# Altium PCB 03按键.PcbDoc (part 1 of 3)
Units mil, origin at the board's own origin, x right, y up, seen from the top; angles counter-clockwise.
Board outline 1673 x 1444 mil, 2 copper layers (Top Layer, Bottom Layer); 1 components, 7 nets, 11 pads, 20 vias.
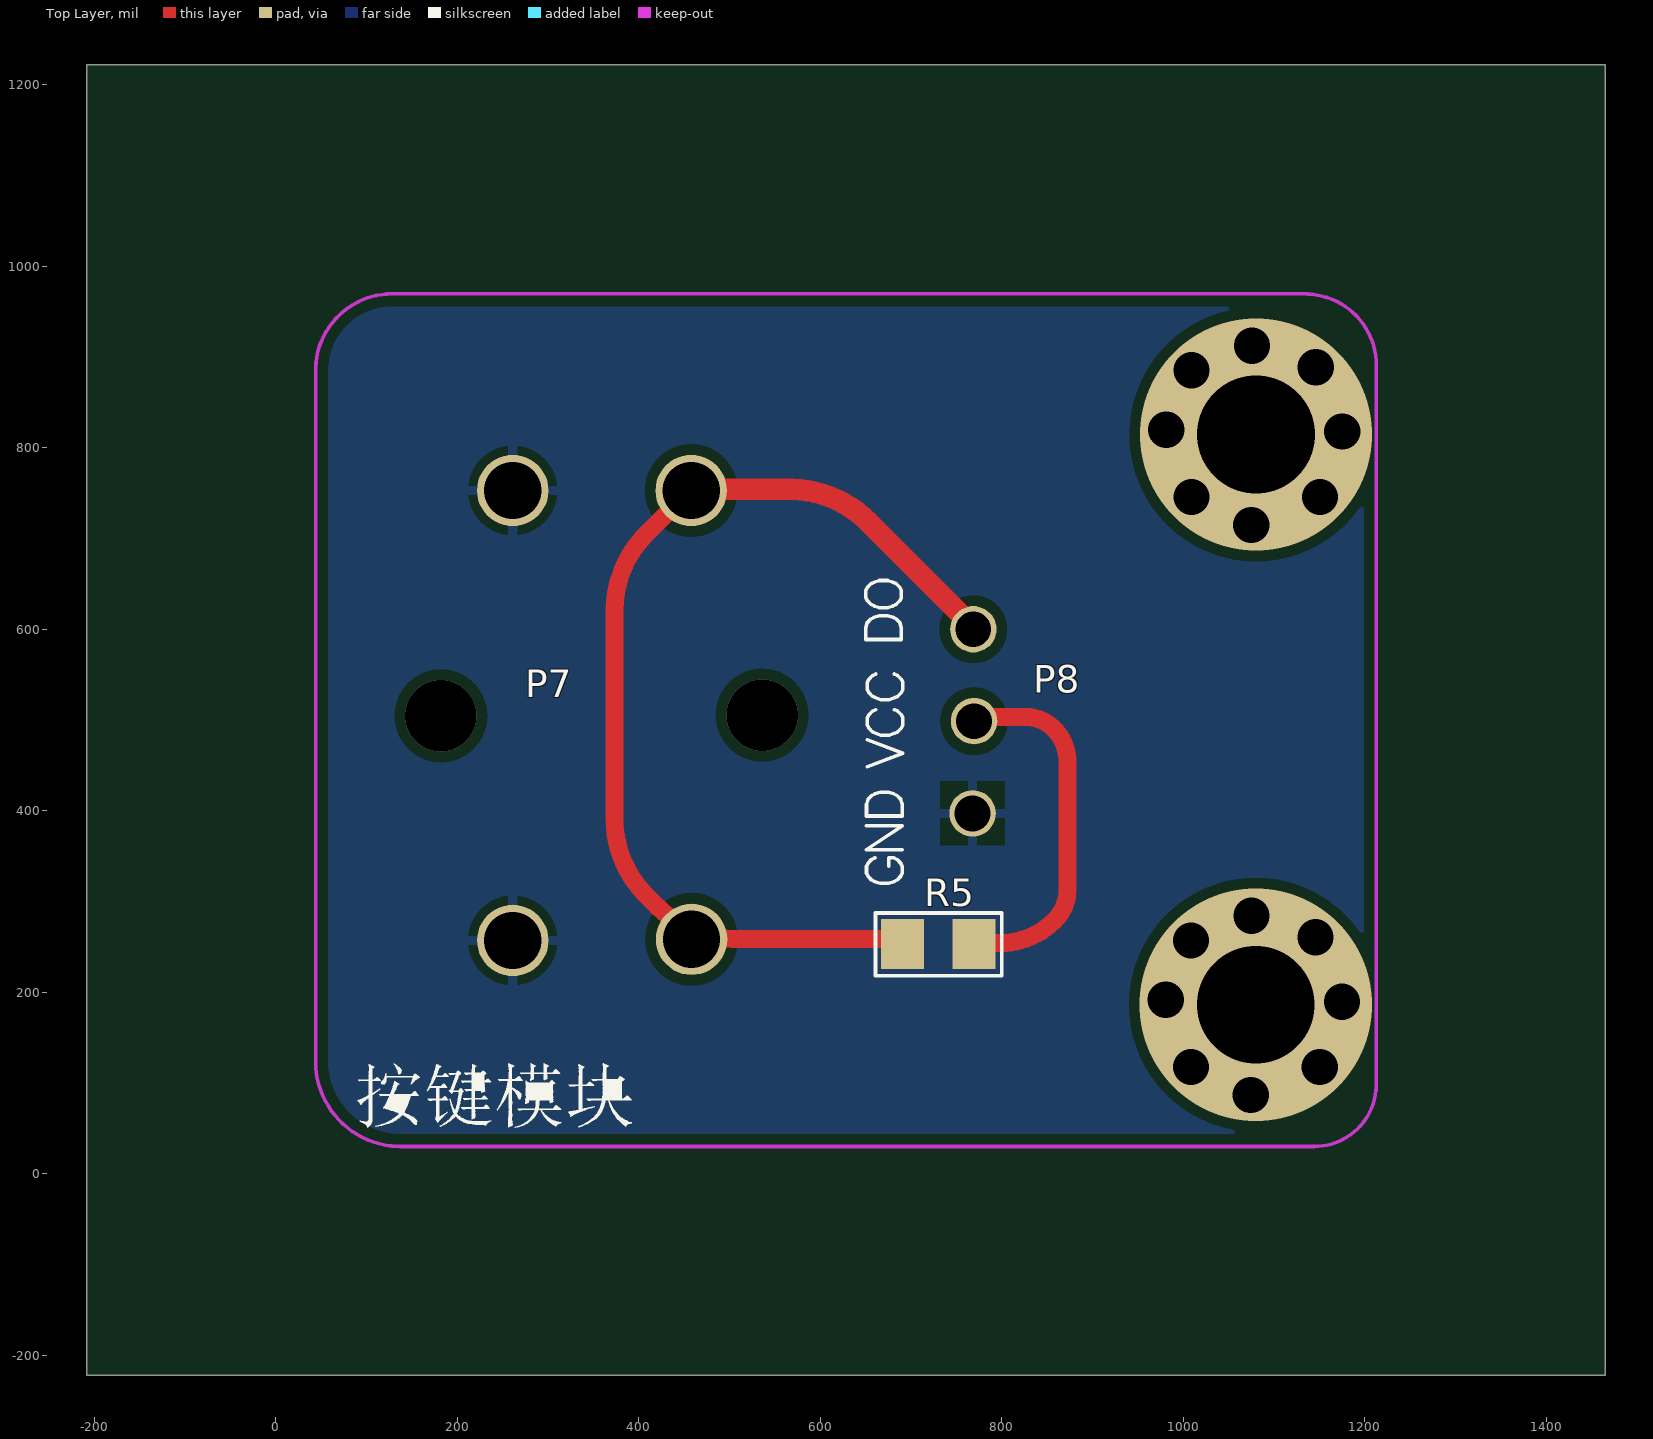
[diagram p0: Top Layer view]
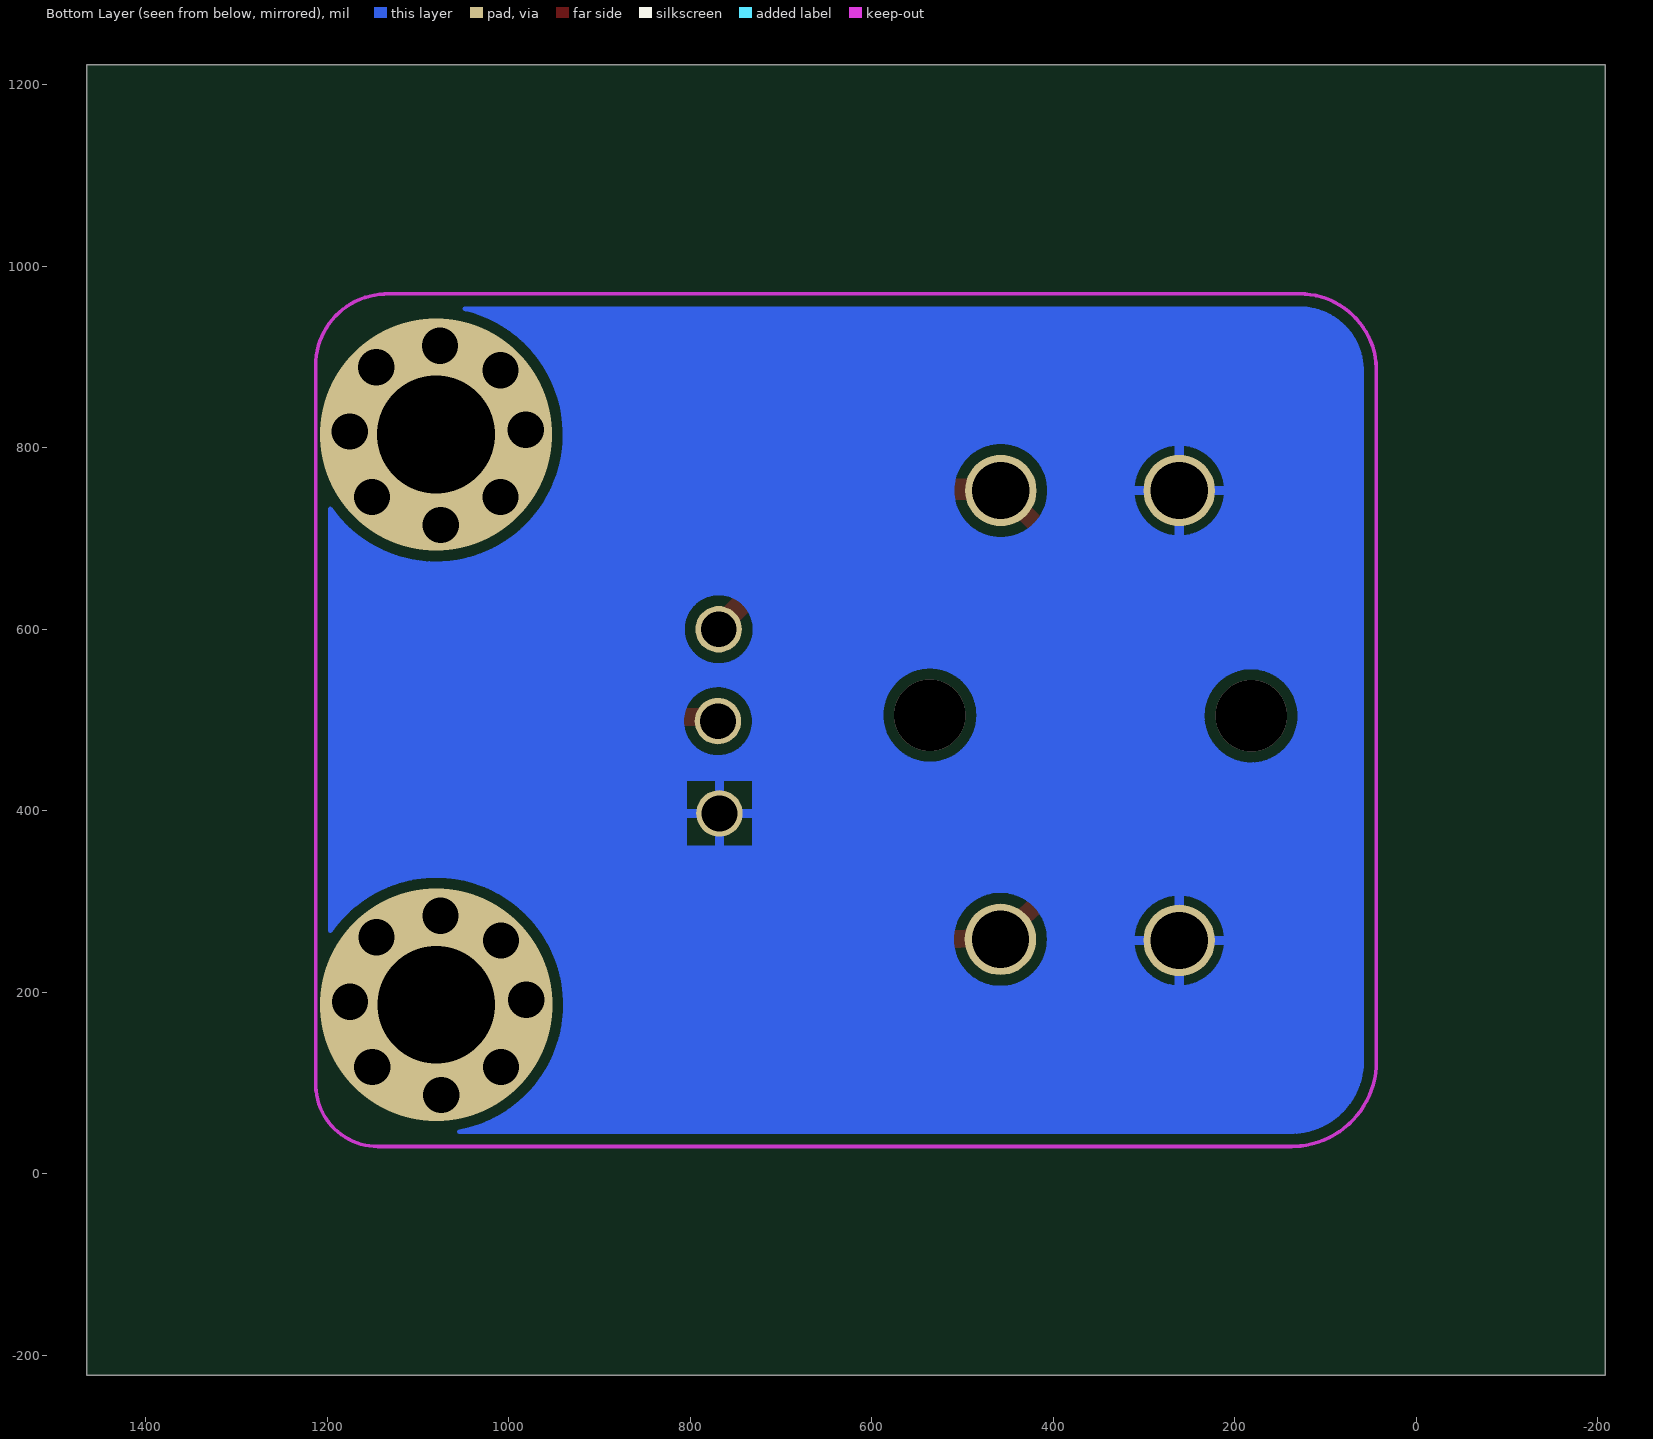
[diagram p1: Bottom Layer view, seen from below]

## Layer stack, top to bottom
Top Layer: signal copper 1.4
Dielectric: dielectric 12.6, FR-4, Dk 4.8
Bottom Layer: signal copper 1.4

## Board outline
-208,-222 1465,-222 1465,1222 -208,1222

## Design rules (kind name [scope] priority, off if disabled: settings)
Clearance CAM_Clearance_2 [OnLayer('Top Layer')] p1: gap=10
Clearance CAM_Clearance_1 [OnLayer('Bottom Layer')] p2: gap=0
Clearance [All] p3: gap=10
PolygonConnect [All] p1: connectstyle=Relief reliefconductorwidth=10 reliefentries=4 polygonreliefangle="90 Angle"
RoutingVias [All] p1: holewidth=28 width=50 viastyle="Through Hole" minholewidth=28 minwidth=50 maxholewidth=28 maxwidth=50
SilkscreenOverComponentPads [All] p1: minsilkscreentomaskgap=10
SolderMaskExpansion [All] p1: expansion=4
Width CAM_Width_2 [OnLayer('Top Layer')] p1: maxlimit=24.62 minlimit=18.68 preferedwidth=19.68
Width CAM_Width_1 [OnLayer('Bottom Layer')] p2: maxlimit=11 minlimit=4 preferedwidth=5
Width [All] p3: maxlimit=10 minlimit=10 preferedwidth=10
27 further rules are at their usual default settings.

## Components (designator, comment, footprint, x,y, rotation, side; value= is the part's Value field where it differs from the comment)
R5 "10K 5%" 0805-R 730,253.43 r180 top

## Footprints (in the part's own frame and the unit in brackets; to place one, negate y for a bottom-side part, rotate by r counter-clockwise, add the part's x,y. Pads: shape width x height; smd on the part's side, far side on the other; paste and mask are expansions set on the pad)
0805-R [mm]
  rect 1.2x1.4 smd: 1(-1,0) 2(1,0)
  silkscreen extent -1.78,-0.86 1.75,0.89, body extent -0.97,-0.61 1.03,0.64, height 0.55

## Free pads (board coordinates)
  rect 26x39.37 smd paste+0 mask+4: 1(696.89,253.43) 1(768.36,253.85)
  round 51.18 hole 39.37: 2(767.96,397.19) 2(768.78,600.1) 2(769.61,498.85)
  round 78.74 hole 62.99: 3(261.27,753.01) 3(261.28,257.19) 3(457.94,753) 3(458.36,258.42)

## Via types
v1: diameter 40, hole 40, Top Layer to Bottom Layer, 16 vias
v2: diameter 255.91, hole 129.92, Top Layer to Bottom Layer, 2 vias
v3: diameter 78.74, hole 78.74, Top Layer to Bottom Layer, 2 vias

## Nets (pads, with @x,y where several pads share a name; then routed paths per layer and width w, separated by ;. In a path a pad name is that pad's centre, name@x,y a point inside that pad or via, vN(x,y) a via of type N, cw(c..) or ccw(c..) an arc to the next point about the centre after c; other vN are vias at no path point)
$Net0: pad.2@767.96,397.19 pad.3@261.27,753.01 pad.3@261.28,257.19 | length 425810.6